# EAGLE board Monsterbot.withname (EAGLE 7.2.0)
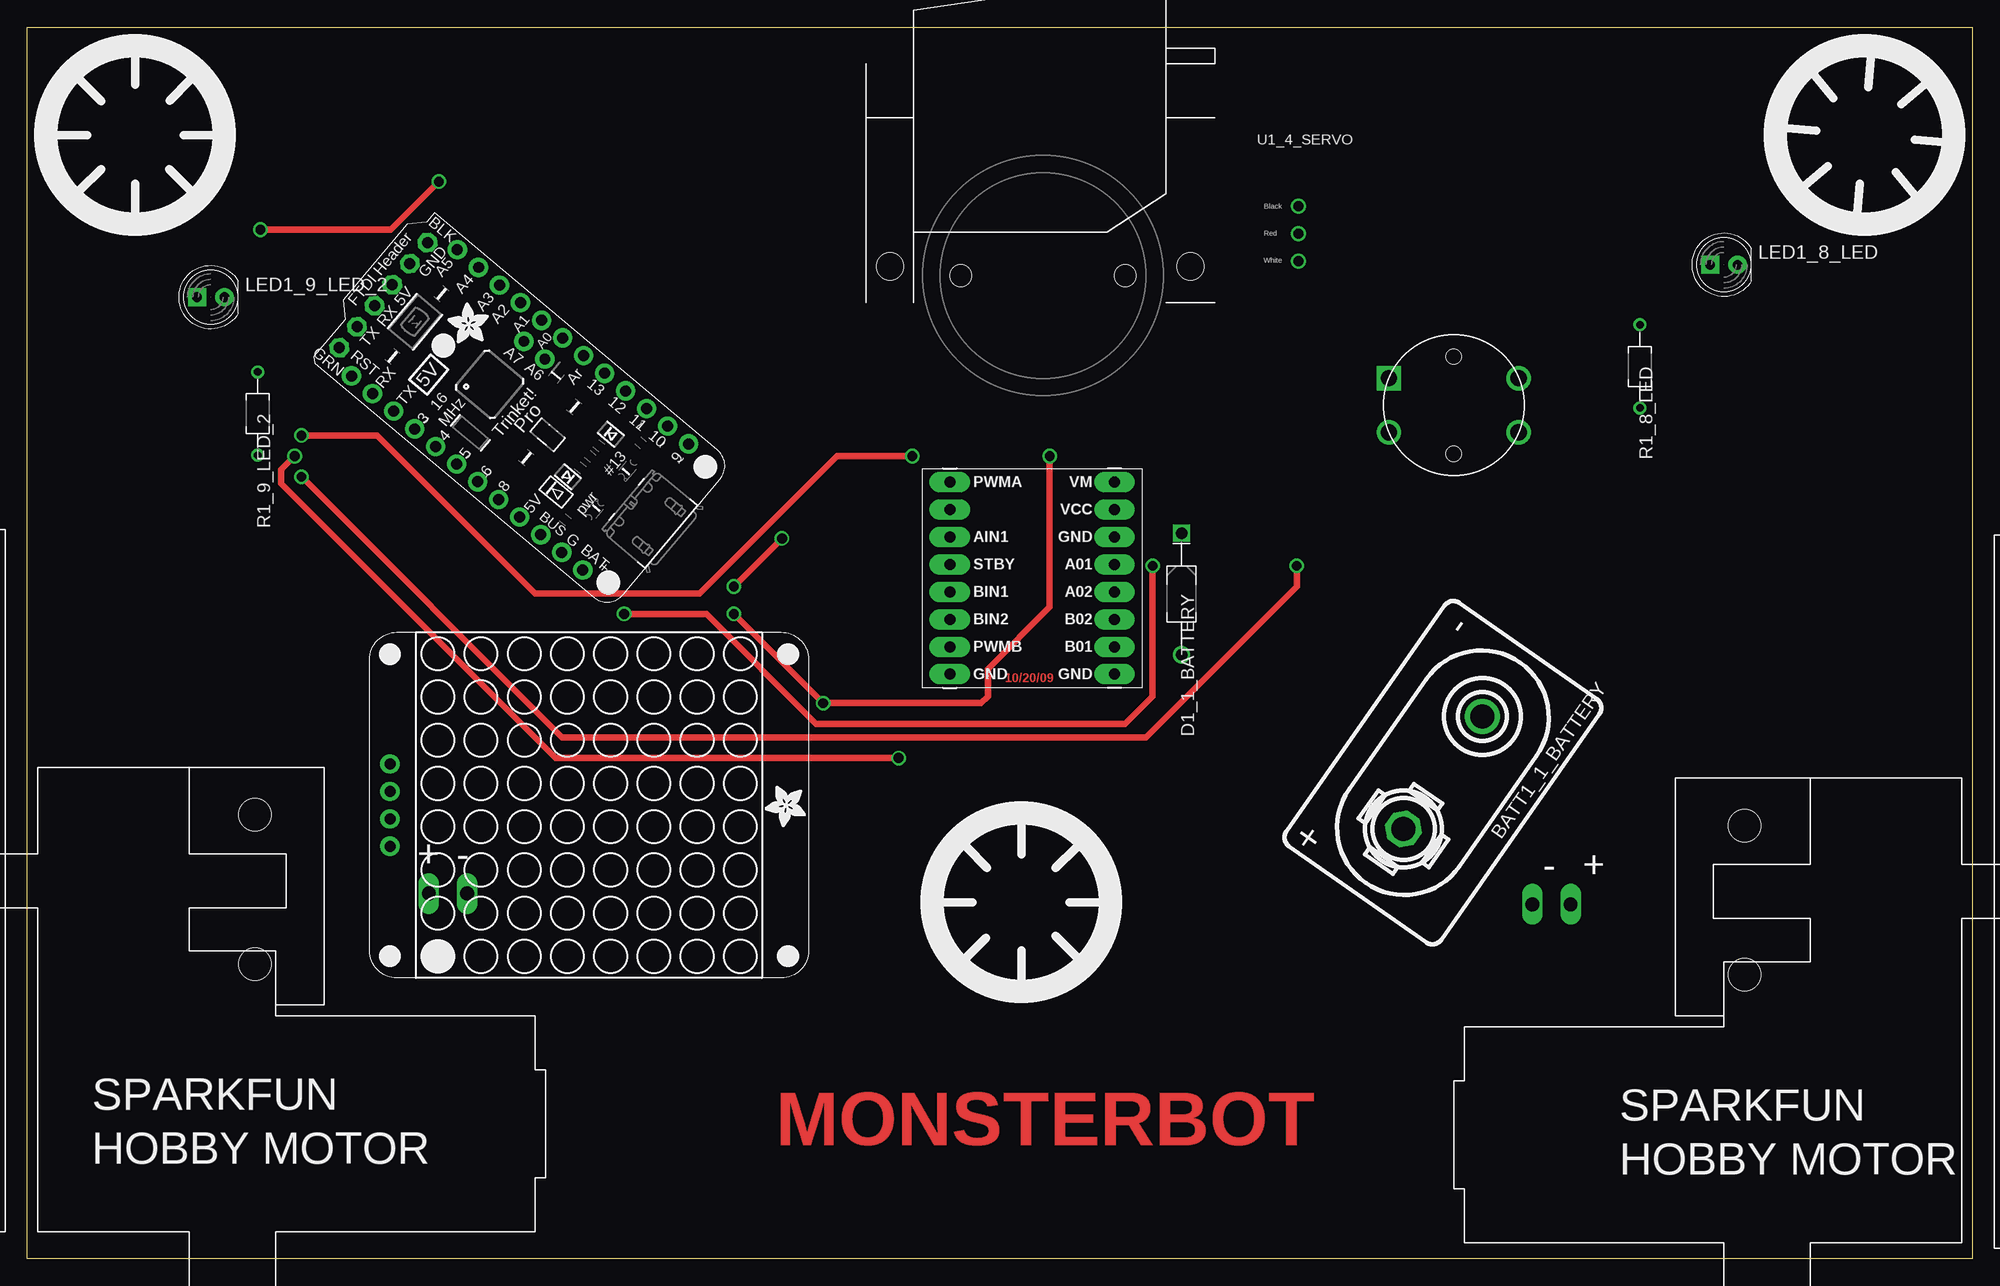
[diagram p0: board, top side]
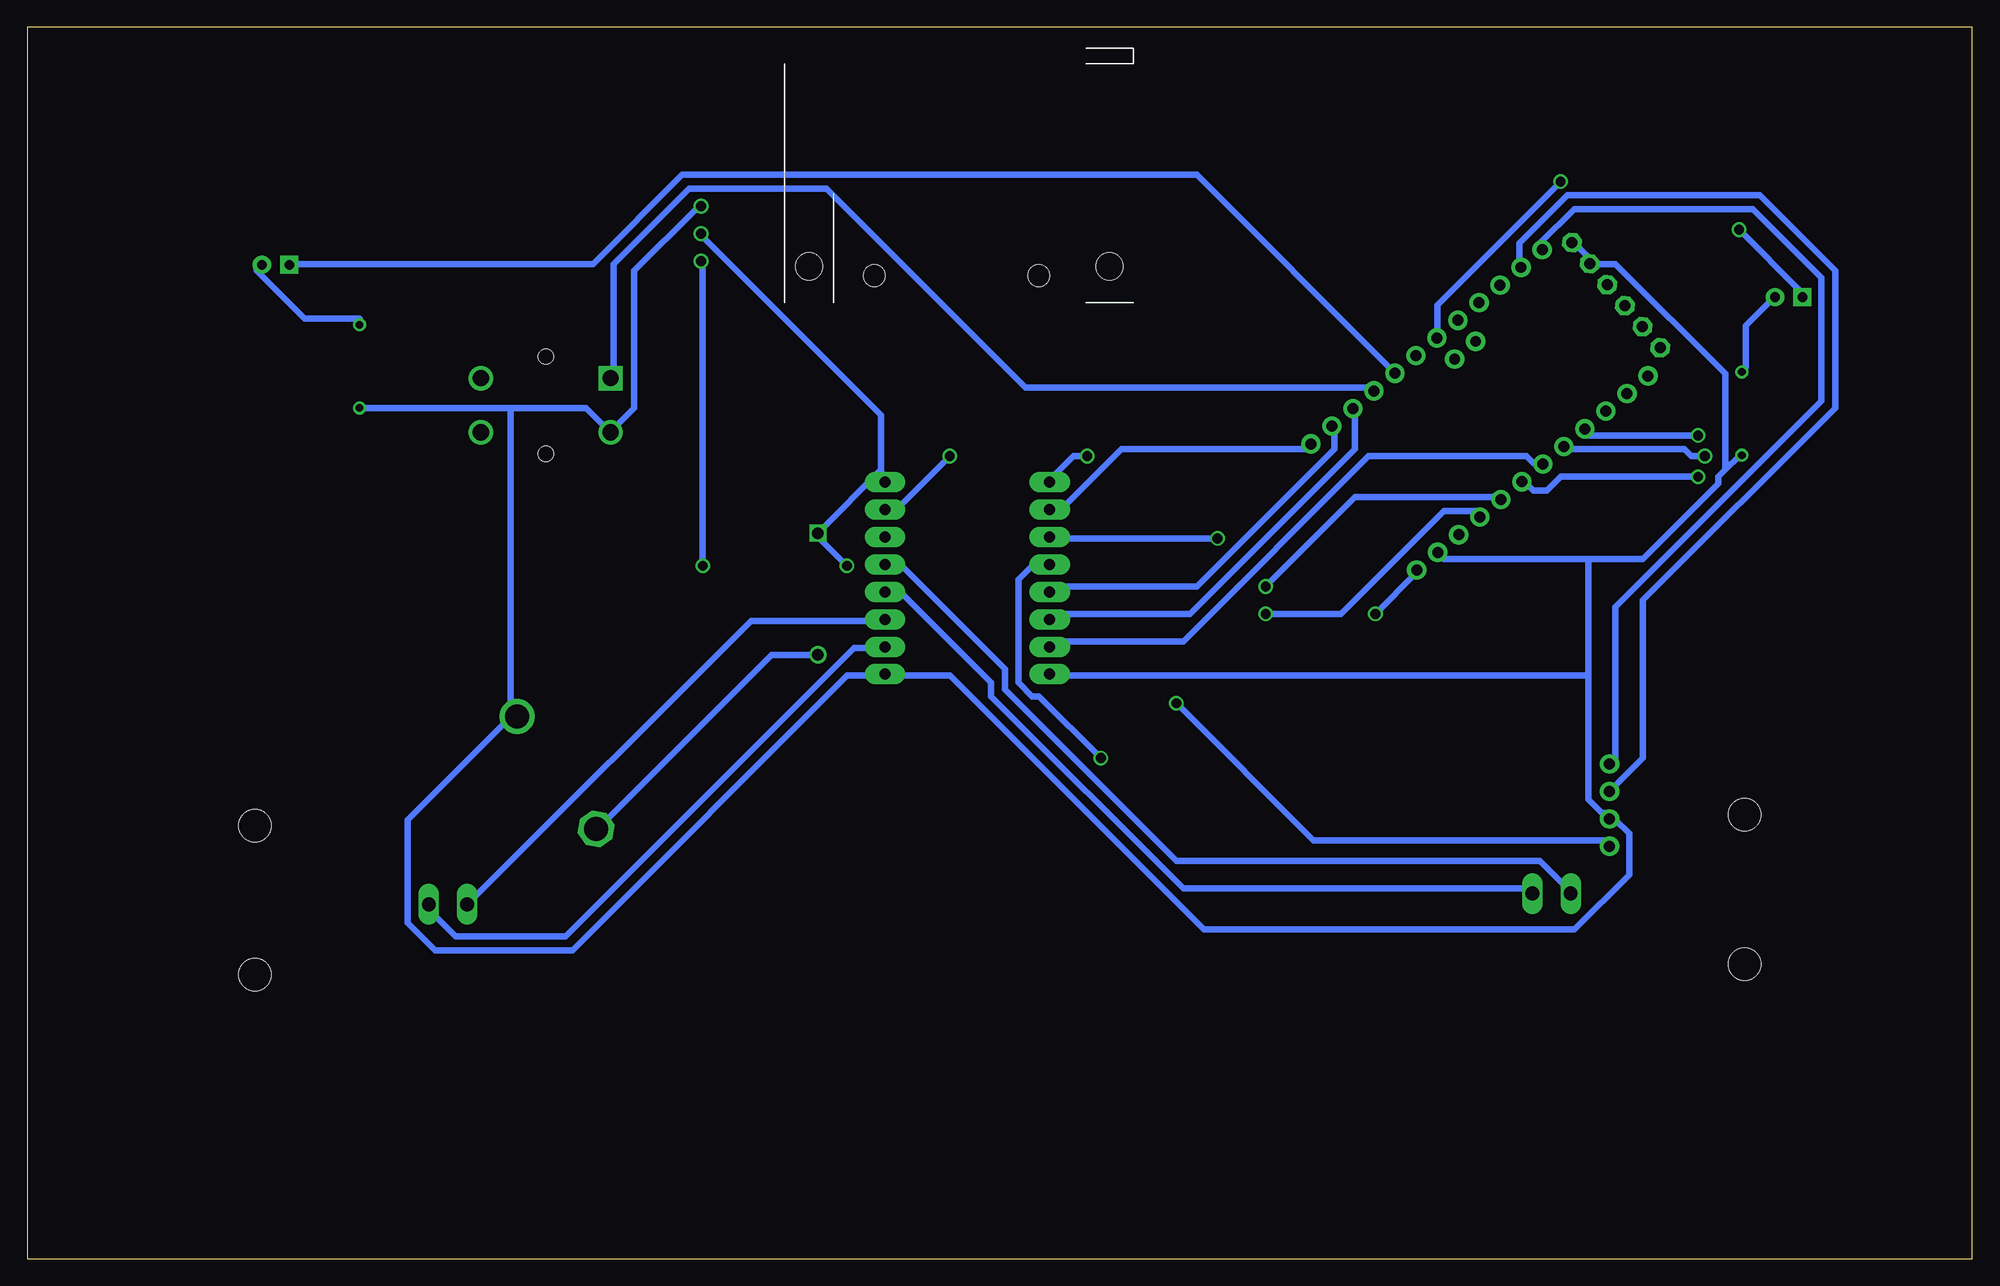
[diagram p1: board, bottom side, seen from below]

Size 180 x 114 mm. Coordinates in mm from the lower left corner, seen from the top.
Outline: 0,0 0,114 180,114 180,0 0,0
Copper layers (1*16): Top 0.035mm / dielectric 1.5mm / Bottom 0.035mm
Design rules "default": minimum track width 0.6mm, minimum drill 0.9mm, track to track 15mil, track to pad 0.6mm, pad to pad 0.5mm, via to via 0.38mm, smd to smd 8mil, copper to edge 40mil, drill to drill 8mil, minimum pad ring 10mil, minimum via ring 8mil, stop-mask expansion 4mil, vias tented up to drill 0mil, thermal gap 10mil
tRestrict: area 105.1,54.2 to 108.5,57.6; area 105.1,65.5 to 108.5,68.9; area 116,90.7 to 119.2,93.9; area 116,93.3 to 119.2,96.5; area 116,95.8 to 119.2,99; area 124,74.5 to 128,78.5; area 124,79.5 to 128,83.5; area 124.7,37.2 to 130,42.4; area 14,87.3 to 17.5,90.7; area 132.1,47.7 to 137.2,52.8; area 137.4,30 to 141.1,35.6; area 141,30 to 144.7,35.6; 46 more areas
vRestrict: area -30,-5 to 49.3,69; area 0.2,94.2 to 19.8,113.8; area 105.2,54.8 to 108.4,68.2; area 114,26.8 to 148,63.2; area 124.5,72 to 139.5,86; area 130.6,-5.6 to 210,68; area 14,86.1 to 19.6,91.9; area 147.9,77.9 to 150.6,87.3; area 154,89.1 to 159.6,94.9; area 160.2,95.2 to 179.8,114.8; area 20,73.6 to 22.7,82.9; area 26.5,60.7 to 64.6,96.9; 5 more areas

## Footprints (pad centres in the part's own frame; a part is rotated, then mirrored left to right if it is on the bottom)
BUTTON-TACTILE-ROUND-ADAFRUIT1009 = drill 1.5 square: P -6,2.5 | drill 1.5: P2 6,2.5; S -6,-2.5; S2 6,-2.5 | hole 1.4: 0,-4.5; 0,4.5
BATTERY_9V_KEYSTONE_968 = drill 2.2: N 6.35,0 | drill 2.2 octagon: P -6.35,0
DIOAD1125W78L520D270_HS = drill 1.06 pad 1.59: A 5.625,0 | drill 1.06 pad 1.59 square: C -5.625,0
SPARKFUN_DUAL_MOTOR_DRIVER = drill 1.016 pad 1.88 long: A01 7.62,1.27; A02 7.62,-1.27; AIN1 -7.62,3.81; AIN2 -7.62,6.35; B01 7.62,-6.35; B02 7.62,-3.81; BIN1 -7.62,-1.27; BIN2 -7.62,-3.81; GND -7.62,-8.89; GND1 7.62,3.81; GND2 7.62,-8.89; PWMA -7.62,8.89; PWMB -7.62,-6.35; STBY -7.62,1.27; VCC 7.62,6.35; VM 7.62,8.89
SPARKFUN_HOBBY_MOTOR_LEFT = drill 1.27 long: + -41.18,-1.18; - -44.72,-1.18 | hole 3: -25.1,-7.7; -25.1,6.1
LED5MM = drill 0.9 pad 1.676 square: A -1.27,0 | drill 0.9 pad 1.676: K 1.27,0
RESAD770W45L370D210_HS = drill 0.7 pad 1.1: 1 -3.85,0; 2 3.85,0
SPARKFUN_HOBBY_MOTOR = drill 1.27 long: + 41.18,-1.18; - 44.72,-1.18 | hole 3: 25.1,-7.7; 25.1,6.1
ADAFRUIT-PRO-TRINKET-5V = drill 1.016 pad 1.778: +5V 7.62,24.13; A0 -7.62,16.51; A1 -7.62,13.97; A2 -7.62,11.43; A3 -7.62,8.89; A4 -7.62,6.35; A5 -7.62,3.81; AREF -7.62,19.05; D3 7.62,11.43; D4 7.62,13.97; D5 7.62,16.51; D6 7.62,19.05; D8 7.62,21.59; D9 -7.62,31.75; D10 -7.62,29.21; D11 -7.62,26.67; D12 -7.62,24.13; D13 -7.62,21.59; GND2 7.62,29.21; RESET 7.62,3.81; RXD1 7.62,6.35; TXD1 7.62,8.89; VBAT 7.62,31.75; VBUS1 7.62,26.67 | drill 1 pad 1.778: A6 -5.08,16.51; A7 -5.08,13.97 | drill 1.016 pad 1.778 octagon: DTR/RTS 6.35,1.27; GND -6.35,1.27; GND1 -3.81,1.27; RXD 1.27,1.27; TXD 3.81,1.27; VBUS -1.27,1.27
ADAFRUIT-1.2IN-8X8-LED-BACKPACK = drill 1.016 pad 1.778: GND -18.415,-1.27; SCL -18.415,3.81; SDA -18.415,1.27; VDD -18.415,-3.81
SERVO_MICRO_SIDE = drill 0.9: A1 35.64,-2.66; GND1 35.64,2.42; PWR1 35.64,-0.12 | hole 2.5: -2.15,-3.15; 25.65,-3.15
ADAFRUIT-3/4IN-CASTER = hole 2: -7.62,0; 7.62,0

## Placement (x,y rotation side)
B1_7_BUTTON  BUTTON-TACTILE-ROUND  [BUTTON-TACTILE-ROUND-ADAFRUIT1009]  132,79 0 top
BATT1_1_BATTERY  BATTERY-9V-VERTICAL  [BATTERY_9V_KEYSTONE_968]  131,45 55 top
D1_1_BATTERY  450mV  [DIOAD1125W78L520D270_HS]  106.82,61.54 270 top
DRVR_3_DRIVE  SPARKFUN_DUAL_MOTOR_DRIVER-BOB  [SPARKFUN_DUAL_MOTOR_DRIVER]  93,63 0 top
L_3_DRIVE  SOLARBOTICS_GM2_LEFTSPARKFUN_HOBBY  [SPARKFUN_HOBBY_MOTOR_LEFT]  184,34 0 top
LED1_8_LED  [LED5MM]  157,92 0 top
LED1_9_LED_2  [LED5MM]  17,89 0 top
R1_8_LED  330  [RESAD770W45L370D210_HS]  149.23,82.59 270 top
R1_9_LED_2  330  [RESAD770W45L370D210_HS]  21.34,78.23 270 top
R_3_DRIVE  SOLARBOTICS_GM2SPARKFUN_HOBBY  [SPARKFUN_HOBBY_MOTOR]  -4,35 0 top
U1_0_BRAIN  ADAFRUIT-PRO-TRINKET-5V-BOB  [ADAFRUIT-PRO-TRINKET-5V]  32,90 230 top
U1_2_DISPLAY  ADAFRUIT-1.2IN-8X8-LED-BACKPACK-BOB  [ADAFRUIT-1.2IN-8X8-LED-BACKPACK]  52,42 0 top
U1_4_SERVO  SERVOMICROSIDE  [SERVO_MICRO_SIDE]  82,95 0 top
U1_5_CASTER  CASTERADAFRUIT-3/4IN  [ADAFRUIT-3/4IN-CASTER]  94,91 0 top
U1_6_PENHOLDER  PENHOLDER  [PENHOLDER]  170,104 310 top
U1_10_PENHOLDER_2  PENHOLDER  [PENHOLDER]  10,104 45 top
U1_11_PENHOLDER_3  PENHOLDER  [PENHOLDER]  92,33 180 top

## Library data of the parts
B1_7_BUTTON BATT1_1_BATTERY L_3_DRIVE LED1_8_LED LED1_9_LED_2 R_3_DRIVE U1_4_SERVO U1_5_CASTER U1_6_PENHOLDER U1_10_PENHOLDER_2 U1_11_PENHOLDER_3 = Components
D1_1_BATTERY = KoalaBuild
DRVR_3_DRIVE U1_0_BRAIN U1_2_DISPLAY = BOBs
R1_8_LED R1_9_LED_2 = KoalaBuild; VALUE_QUERY: 330

## Nets
+5V_0_BRAIN: DRVR_3_DRIVE.VCC U1_0_BRAIN.+5V U1_2_DISPLAY.VDD
A0_0_BRAIN: LED1_9_LED_2.A U1_0_BRAIN.A0
A1_0_BRAIN: U1_0_BRAIN.A1
A01_3_DRIVE: DRVR_3_DRIVE.A01 R_3_DRIVE.+
A2_0_BRAIN: U1_0_BRAIN.A2
A02_3_DRIVE: DRVR_3_DRIVE.A02 R_3_DRIVE.-
A3_0_BRAIN: U1_0_BRAIN.A3
A4_0_BRAIN: U1_0_BRAIN.A4 U1_2_DISPLAY.SDA
A5_0_BRAIN: U1_0_BRAIN.A5 U1_2_DISPLAY.SCL
A6_0_BRAIN: U1_0_BRAIN.A6
A7_0_BRAIN: U1_0_BRAIN.A7
AREF_0_BRAIN: U1_0_BRAIN.AREF
B01_3_DRIVE: DRVR_3_DRIVE.B01 L_3_DRIVE.+
B02_3_DRIVE: DRVR_3_DRIVE.B02 L_3_DRIVE.-
D3_0_BRAIN: DRVR_3_DRIVE.PWMA U1_0_BRAIN.D3
D4_0_BRAIN: DRVR_3_DRIVE.STBY U1_0_BRAIN.D4
D5_0_BRAIN: DRVR_3_DRIVE.PWMB U1_0_BRAIN.D5
D6_0_BRAIN: U1_0_BRAIN.D6 U1_4_SERVO.A1
D8_0_BRAIN: DRVR_3_DRIVE.AIN1 U1_0_BRAIN.D8
D9_0_BRAIN: DRVR_3_DRIVE.AIN2 U1_0_BRAIN.D9
D10_0_BRAIN: DRVR_3_DRIVE.BIN1 U1_0_BRAIN.D10
D11_0_BRAIN: DRVR_3_DRIVE.BIN2 U1_0_BRAIN.D11
D12_0_BRAIN: B1_7_BUTTON.P U1_0_BRAIN.D12
D13_0_BRAIN: LED1_8_LED.A U1_0_BRAIN.D13
DTR/RTS_0_BRAIN: U1_0_BRAIN.DTR/RTS
GND1_3_DRIVE: DRVR_3_DRIVE.GND1
GND_7_BUTTON: B1_7_BUTTON.S BATT1_1_BATTERY.N DRVR_3_DRIVE.GND DRVR_3_DRIVE.GND2 R1_8_LED.2 R1_9_LED_2.2 U1_0_BRAIN.GND U1_0_BRAIN.GND1 U1_0_BRAIN.GND2 U1_2_DISPLAY.GND U1_4_SERVO.GND1
N$1_1_BATTERY: BATT1_1_BATTERY.P D1_1_BATTERY.A
N$1_8_LED: LED1_8_LED.K R1_8_LED.1
N$1_9_LED_2: LED1_9_LED_2.K R1_9_LED_2.1
POS_1_BATTERY: D1_1_BATTERY.C DRVR_3_DRIVE.VM U1_0_BRAIN.VBAT U1_4_SERVO.PWR1
RESET_0_BRAIN: U1_0_BRAIN.RESET
RXD1_0_BRAIN: U1_0_BRAIN.RXD1
RXD_0_BRAIN: U1_0_BRAIN.RXD
TXD1_0_BRAIN: U1_0_BRAIN.TXD1
TXD_0_BRAIN: U1_0_BRAIN.TXD
VBUS1_0_BRAIN: U1_0_BRAIN.VBUS1
VBUS_0_BRAIN: U1_0_BRAIN.VBUS

## Tracks (layer width: path | path; a pad name or v marks a point on that pad's centre or on a via)
+5V_0_BRAIN  (via drill 0.9)
  Top 0.6: v65.41,59.69 v73.66,51.44 88.27,51.44 88.9,52.07 88.9,54.61 94.61,60.33 v94.61,74.3
  Bottom 0.6: DRVR_3_DRIVE.VCC 100.33,69.85 99.06,69.85 v94.61,74.3 | U1_2_DISPLAY.VDD 33.66,38.73 60.96,38.73 v73.66,51.44 | U1_0_BRAIN.+5V 45.72,69.22 48.9,69.22 58.42,59.69 v65.41,59.69
A0_0_BRAIN  (via drill 0.9)
  Top 0.6: v21.59,95.25 33.66,95.25 v38.1,99.69
  Bottom 0.6: LED1_9_LED_2.A 15.88,89.53 v21.59,95.25 | U1_0_BRAIN.A0 49.53,85.72 49.53,88.27 v38.1,99.69
A01_3_DRIVE
  Bottom 0.6: DRVR_3_DRIVE.A01 100.33,64.14 99.06,64.14 89.53,54.61 89.53,52.7 73.66,36.83 40.01,36.83 37.47,34.29 R_3_DRIVE.+
A02_3_DRIVE
  Bottom 0.6: DRVR_3_DRIVE.A02 100.33,61.59 99.06,61.59 90.81,53.34 90.81,52.07 73.03,34.29 41.27,34.29 R_3_DRIVE.-
A4_0_BRAIN
  Bottom 0.6: U1_2_DISPLAY.SDA 33.02,43.81 30.48,46.35 30.48,60.96 12.7,78.74 12.7,91.44 19.68,98.42 37.47,98.42 41.91,93.98 41.91,92.08 U1_0_BRAIN.A4
A5_0_BRAIN
  Bottom 0.6: U1_2_DISPLAY.SCL 33.02,46.35 33.02,60.33 13.97,79.38 13.97,90.81 20.32,97.16 36.83,97.16 40.01,93.98 U1_0_BRAIN.A5
B01_3_DRIVE
  Bottom 0.6: DRVR_3_DRIVE.B01 100.97,56.52 103.5,56.52 130.18,29.84 140.34,29.84 142.88,32.38 L_3_DRIVE.+
B02_3_DRIVE
  Bottom 0.6: DRVR_3_DRIVE.B02 100.97,59.05 113.03,59.05 139.06,33.02 L_3_DRIVE.-
D3_0_BRAIN  (via drill 0.9)
  Top 0.6: v25.4,76.2 32.38,76.2 46.99,61.59 62.23,61.59 74.93,74.3 v81.92,74.3
  Bottom 0.6: v25.4,76.2 35.56,76.2 U1_0_BRAIN.D3 | v81.92,74.3 83.19,74.3 85.09,72.39 DRVR_3_DRIVE.PWMA
D4_0_BRAIN  (via drill 0.9)
  Top 0.6: v24.77,74.3 23.5,73.03 23.5,71.75 48.9,46.35 v80.64,46.35
  Bottom 0.6: v24.77,74.3 26.04,74.3 26.67,74.93 37.47,74.93 U1_0_BRAIN.D4 | DRVR_3_DRIVE.STBY 85.72,64.14 87,64.14 88.27,62.87 88.27,53.34 87,52.07 86.36,52.07 v80.64,46.35
D5_0_BRAIN
  Bottom 0.6: U1_0_BRAIN.D5 40.01,73.66 40.64,73.66 41.27,74.3 55.88,74.3 73.03,57.15 85.09,57.15 DRVR_3_DRIVE.PWMB
D6_0_BRAIN  (via drill 0.9)
  Top 0.6: v117.47,64.14 117.47,62.23 103.5,48.26 49.53,48.26 v25.4,72.39
  Bottom 0.6: v117.47,64.14 117.47,92.08 U1_4_SERVO.A1 | v25.4,72.39 38.1,72.39 39.37,71.12 40.64,71.12 41.27,71.75 U1_0_BRAIN.D6
D8_0_BRAIN  (via drill 0.9)
  Top 0.6: v69.85,66.67 v65.41,62.23
  Bottom 0.6: U1_0_BRAIN.D8 43.81,70.48 57.15,70.48 v65.41,62.23 | v69.85,66.67 85.09,66.67 DRVR_3_DRIVE.AIN1
D9_0_BRAIN
  Bottom 0.6: U1_0_BRAIN.D9 61.59,74.93 78.74,74.93 83.82,69.85 85.09,69.85 DRVR_3_DRIVE.AIN2
D10_0_BRAIN
  Bottom 0.6: U1_0_BRAIN.D10 59.05,76.83 59.05,74.93 71.75,62.23 85.09,62.23 DRVR_3_DRIVE.BIN1
D11_0_BRAIN
  Bottom 0.6: U1_0_BRAIN.D11 57.15,78.11 57.15,74.93 72.39,59.69 85.09,59.69 DRVR_3_DRIVE.BIN2
D12_0_BRAIN
  Bottom 0.6: B1_7_BUTTON.P 125.73,81.92 125.73,92.08 118.75,99.06 106.05,99.06 87.63,80.64 55.88,80.64 U1_0_BRAIN.D12
D13_0_BRAIN
  Bottom 0.6: LED1_8_LED.A 155.57,92.08 127.64,92.08 119.38,100.33 71.75,100.33 53.98,82.55 U1_0_BRAIN.D13
GND_7_BUTTON
  Bottom 0.6: U1_4_SERVO.GND1 118.11,97.16 123.83,91.44 123.83,78.74 125.73,76.83 B1_7_BUTTON.S 126.36,76.83 128.27,78.74 135.25,78.74 | 135.25,78.74 135.25,50.8 BATT1_1_BATTERY.N 135.25,50.16 144.78,40.64 144.78,31.11 142.24,28.57 129.54,28.57 104.14,53.98 100.97,53.98 DRVR_3_DRIVE.GND2 100.33,53.98 94.61,53.98 71.12,30.48 36.83,30.48 31.75,35.56 31.75,39.37 33.02,40.64 U1_2_DISPLAY.GND 33.66,41.27 34.29,41.27 35.56,42.55 35.56,53.98 | 135.25,78.74 R1_8_LED.2 | R1_9_LED_2.2 21.59,74.3 22.86,73.03 | 22.86,73.03 22.86,81.92 33.02,92.08 34.92,92.08 U1_0_BRAIN.GND1 35.56,92.71 36.83,93.98 U1_0_BRAIN.GND | 22.86,73.03 23.5,72.39 23.5,71.75 30.48,64.77 35.56,64.77 | 35.56,53.98 85.09,53.98 DRVR_3_DRIVE.GND | 35.56,64.77 35.56,53.98 | 35.56,64.77 48.9,64.77 U1_0_BRAIN.GND2
N$1_1_BATTERY
  Bottom 0.6: D1_1_BATTERY.A 107.31,55.88 111.12,55.88 127,40.01 BATT1_1_BATTERY.P
N$1_8_LED
  Bottom 0.6: R1_8_LED.1 149.22,87 154.31,87 158.75,91.44 LED1_8_LED.K
N$1_9_LED_2
  Bottom 0.6: LED1_9_LED_2.K 18.41,88.9 20.95,86.36 20.95,82.55 R1_9_LED_2.1
POS_1_BATTERY  (via drill 0.9)
  Top 0.6: v104.14,64.14 104.14,52.07 101.6,49.53 73.03,49.53 62.87,59.69 v55.24,59.69
  Bottom 0.6: DRVR_3_DRIVE.VM 100.97,72.39 100.97,73.03 | 100.97,73.03 100.97,78.11 117.47,94.61 U1_4_SERVO.PWR1 | 100.97,73.03 106.68,67.31 D1_1_BATTERY.C 106.68,66.67 v104.14,64.14 | U1_0_BRAIN.VBAT 51.44,63.5 v55.24,59.69

## Text on the board
Top: MONSTERBOT